# EAGLE board shifter2-8rgb-atmel (EAGLE 6.4)
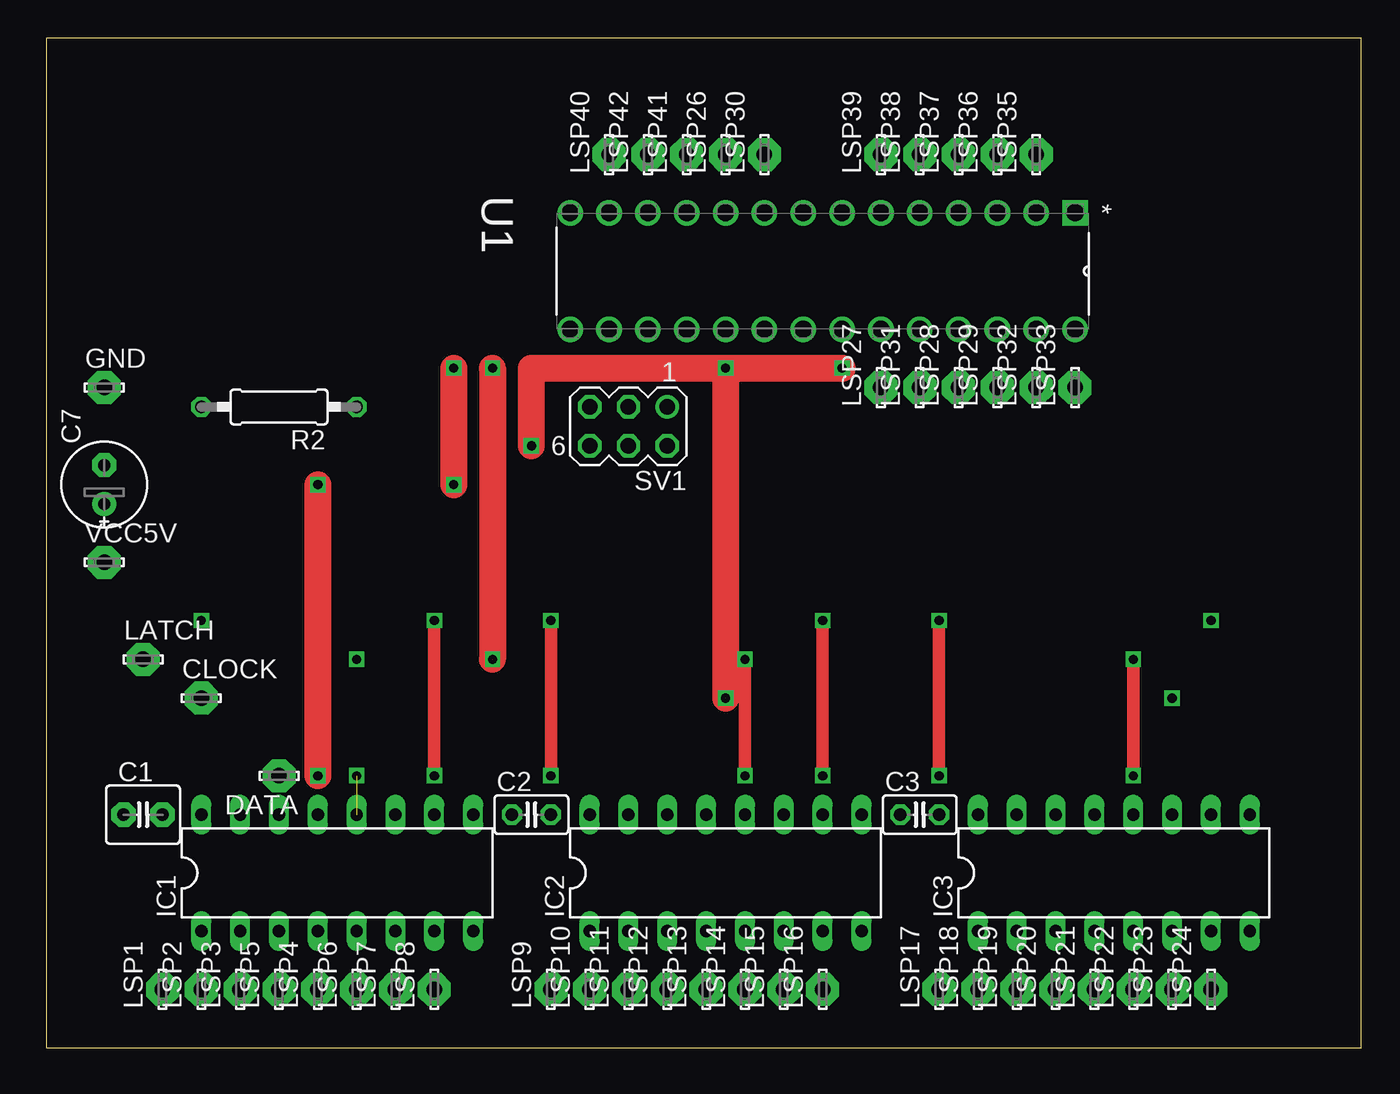
[diagram p0: board, top side]
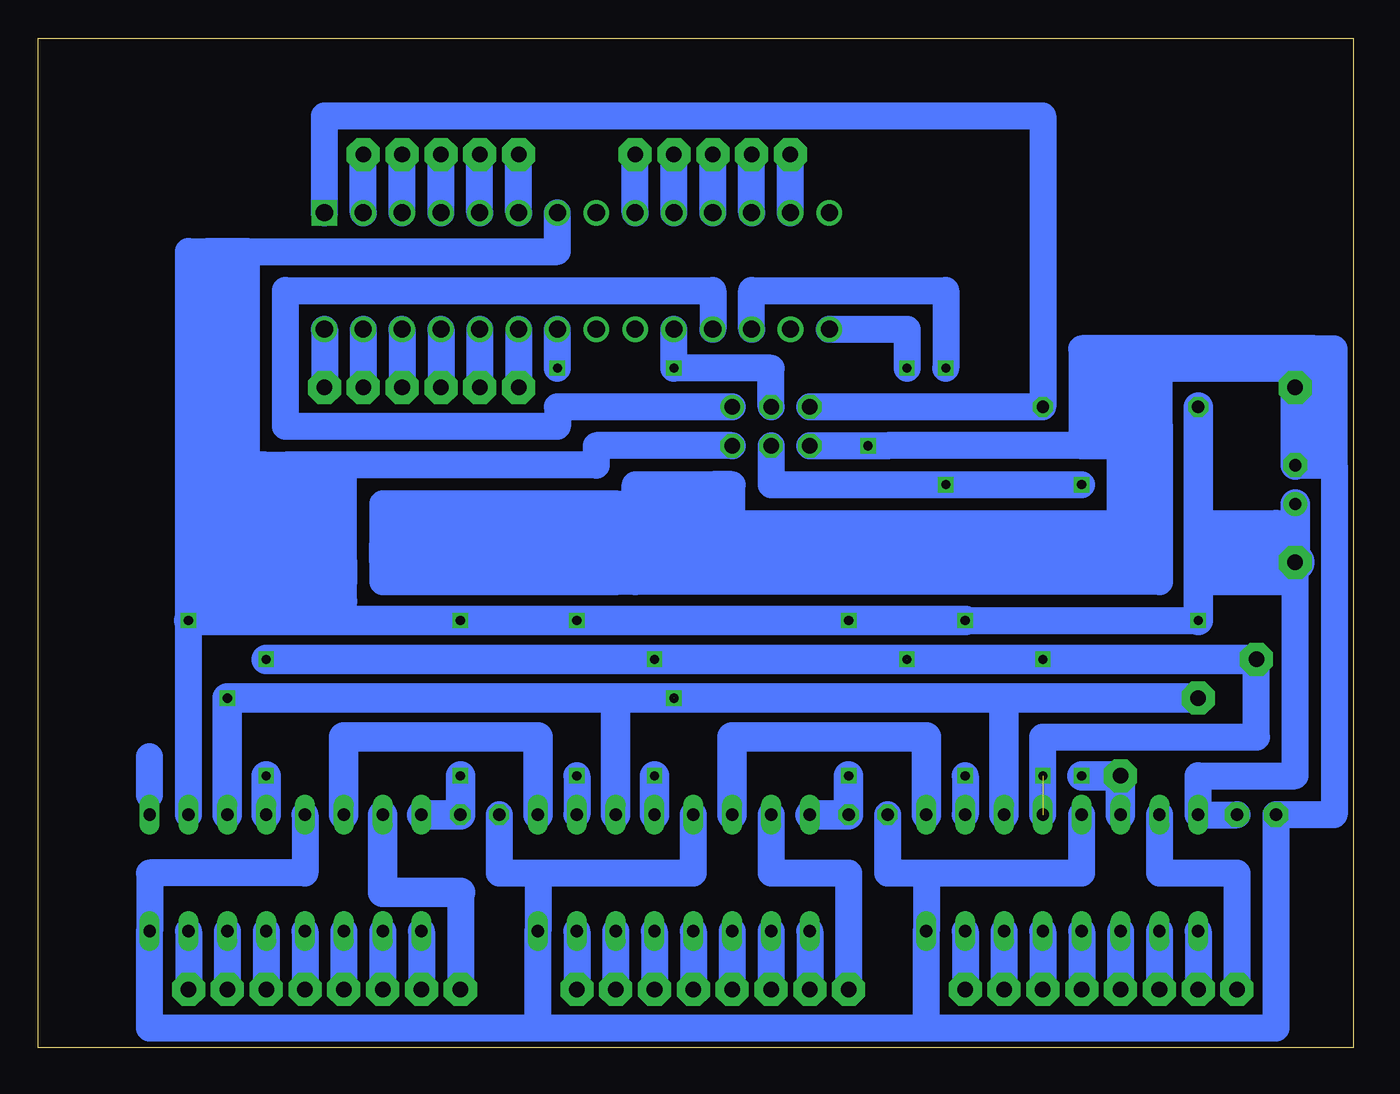
[diagram p1: board, bottom side, seen from below]

Size 86.03 x 66.03 mm. Coordinates in mm from the lower left corner, seen from the top.
Outline: 0,0 86.03,0 86.03,66.03 0,66.03 0,0
Copper layers (1*16): Top 0.035mm / dielectric 1.5mm / Bottom 0.035mm
Design rules "default *": minimum track width 10mil, minimum drill 24mil, track to track 8mil, track to pad 8mil, pad to pad 8mil, via to via 8mil, smd to smd 8mil, copper to edge 40mil, drill to drill 8mil, minimum pad ring 10mil, minimum via ring 8mil, stop-mask expansion 4mil, vias tented up to drill 0mil, thermal gap 10mil

## Footprints (pad centres in the part's own frame; a part is rotated, then mirrored left to right if it is on the bottom)
C2.5-4 = drill 0.813 pad 1.6 octagon: 1 -1.27,0; 2 1.27,0
C025-025X050 = drill 0.813 octagon: 1 -1.27,0; 2 1.27,0
E2,5-6E = drill 0.813 pad 1.575: + -1.27,0 | drill 0.813 pad 1.575 octagon: - 1.27,0
LSP10 = drill 1.016 pad 2.159 octagon: MP 0,0
DIL16 = drill 0.813 long: 1 -8.89,-3.81; 2 -6.35,-3.81; 3 -3.81,-3.81; 4 -1.27,-3.81; 5 1.27,-3.81; 6 3.81,-3.81; 7 6.35,-3.81; 8 8.89,-3.81; 9 8.89,3.81; 10 6.35,3.81; 11 3.81,3.81; 12 1.27,3.81; 13 -1.27,3.81; 14 -3.81,3.81; 15 -6.35,3.81; 16 -8.89,3.81
0207/10 = drill 0.813 octagon: 1 -5.08,0; 2 5.08,0
MA03-2 = drill 1.016: 1 -2.54,-1.27 | drill 1.016 octagon: 2 -2.54,1.27; 3 0,-1.27; 4 0,1.27; 5 2.54,-1.27; 6 2.54,1.27
DIP254P762X457-28 = drill 1.118 square: 1 -7.62,33.02 | drill 1.118: 2 -7.62,30.48; 3 -7.62,27.94; 4 -7.62,25.4; 5 -7.62,22.86; 6 -7.62,20.32; 7 -7.62,17.78; 8 -7.62,15.24; 9 -7.62,12.7; 10 -7.62,10.16; 11 -7.62,7.62; 12 -7.62,5.08; 13 -7.62,2.54; 14 -7.62,0; 15 0,0; 16 0,2.54; 17 0,5.08; 18 0,7.62; 19 0,10.16; 20 0,12.7; 21 0,15.24; 22 0,17.78; 23 0,20.32; 24 0,22.86; 25 0,25.4; 26 0,27.94; 27 0,30.48; 28 0,33.02

## Placement (x,y rotation side)
C1  [C2.5-4]  6.35,15.24 0 top
C2  [C025-025X050]  31.75,15.24 0 top
C3  [C025-025X050]  57.15,15.24 0 top
C7  [E2,5-6E]  3.81,36.83 90 top
CLOCK  LSP10  [LSP10]  10.16,22.86 0 top
DATA  LSP10  [LSP10]  15.24,17.78 180 top
GND  LSP10  [LSP10]  3.81,43.18 0 top
IC1  74HC595N  [DIL16]  19.05,11.43 0 top
IC2  74HC595N  [DIL16]  44.45,11.43 0 top
IC3  74HC595N  [DIL16]  69.85,11.43 0 top
LATCH  LSP10  [LSP10]  6.35,25.4 0 top
LSP1  LSP10  [LSP10]  7.62,3.81 90 top
LSP2  LSP10  [LSP10]  10.16,3.81 90 top
LSP3  LSP10  [LSP10]  12.7,3.81 90 top
LSP4  LSP10  [LSP10]  17.78,3.81 90 top
LSP5  LSP10  [LSP10]  15.24,3.81 90 top
LSP6  LSP10  [LSP10]  20.32,3.81 90 top
LSP7  LSP10  [LSP10]  22.86,3.81 90 top
LSP8  LSP10  [LSP10]  25.4,3.81 90 top
LSP9  LSP10  [LSP10]  33.02,3.81 90 top
LSP10  LSP10  [LSP10]  35.56,3.81 90 top
LSP11  LSP10  [LSP10]  38.1,3.81 90 top
LSP12  LSP10  [LSP10]  40.64,3.81 90 top
LSP13  LSP10  [LSP10]  43.18,3.81 90 top
LSP14  LSP10  [LSP10]  45.72,3.81 90 top
LSP15  LSP10  [LSP10]  48.26,3.81 90 top
LSP16  LSP10  [LSP10]  50.8,3.81 90 top
LSP17  LSP10  [LSP10]  58.42,3.81 90 top
LSP18  LSP10  [LSP10]  60.96,3.81 90 top
LSP19  LSP10  [LSP10]  63.5,3.81 90 top
LSP20  LSP10  [LSP10]  66.04,3.81 90 top
LSP21  LSP10  [LSP10]  68.58,3.81 90 top
LSP22  LSP10  [LSP10]  71.12,3.81 90 top
LSP23  LSP10  [LSP10]  73.66,3.81 90 top
LSP24  LSP10  [LSP10]  76.2,3.81 90 top
LSP26  LSP10  [LSP10]  44.45,58.42 90 top
LSP27  LSP10  [LSP10]  54.61,43.18 90 top
LSP28  LSP10  [LSP10]  59.69,43.18 90 top
LSP29  LSP10  [LSP10]  62.23,43.18 90 top
LSP30  LSP10  [LSP10]  46.99,58.42 90 top
LSP31  LSP10  [LSP10]  57.15,43.18 90 top
LSP32  LSP10  [LSP10]  64.77,43.18 90 top
LSP33  LSP10  [LSP10]  67.31,43.18 90 top
LSP35  LSP10  [LSP10]  64.77,58.42 90 top
LSP36  LSP10  [LSP10]  62.23,58.42 90 top
LSP37  LSP10  [LSP10]  59.69,58.42 90 top
LSP38  LSP10  [LSP10]  57.15,58.42 90 top
LSP39  LSP10  [LSP10]  54.61,58.42 90 top
LSP40  LSP10  [LSP10]  36.83,58.42 90 top
LSP41  LSP10  [LSP10]  41.91,58.42 90 top
LSP42  LSP10  [LSP10]  39.37,58.42 90 top
R2  [0207/10]  15.24,41.91 180 top
SV1  [MA03-2]  38.1,40.64 180 top
U1  ATMEGA168A-PU  [DIP254P762X457-28]  34.29,46.99 270 top
VCC5V  LSP10  [LSP10]  3.81,31.75 0 top

## Library data of the parts
C1 = capacitor-wima
C2 C3 R2 = resistor
C7 = rcl
CLOCK DATA GND LATCH LSP1-LSP24 LSP26-LSP33 LSP35-LSP42 VCC5V = solpad
IC1-IC3 = 74xx-eu
SV1 = con-lstb; OC_FARNELL: unknown; OC_NEWARK: unknown
U1 = Atmel_By_element14_Batch_1; DESCRIPTION: MCU; MPN: ATMEGA168A-PU; OC_FARNELL: 1841605; OC_NEWARK: 12T1297; PACKAGE: DIP-28; SUPPLIER: Atmel

## Nets
AVCC: U1.20
GND: SV1.6 U1.22
N$1: IC2.15 LSP9.MP
N$2: IC2.1 LSP10.MP
N$3: IC2.2 LSP11.MP
N$4: IC1.9 IC2.14
N$5: IC2.9 IC3.14
N$6: IC2.3 LSP12.MP
N$7: IC2.4 LSP13.MP
N$8: IC2.5 LSP14.MP
N$10: IC2.6 LSP15.MP
N$11: IC2.7 LSP16.MP
N$12: IC1.15 LSP1.MP
N$13: IC1.1 LSP2.MP
N$14: IC1.2 LSP3.MP
N$15: IC1.4 LSP4.MP
N$16: IC1.3 LSP5.MP
N$17: IC1.5 LSP6.MP
N$18: IC1.6 LSP7.MP
N$19: IC1.7 LSP8.MP
N$20: R2.1 SV1.5 U1.1
N$21: LSP28.MP U1.25
N$22: DATA.MP IC1.14 SV1.4 U1.17
N$23: SV1.1 U1.18
N$24: LSP29.MP U1.26
N$25: LSP26.MP U1.10
N$26: LSP30.MP U1.9
N$27: IC3.15 LSP17.MP
N$28: IC3.1 LSP18.MP
N$29: IC3.2 LSP19.MP
N$30: IC3.3 LSP20.MP
N$31: IC3.4 LSP21.MP
N$32: IC3.5 LSP22.MP
N$33: IC3.6 LSP23.MP
N$34: IC3.7 LSP24.MP
N$35: LSP27.MP U1.23
N$36: LSP31.MP U1.24
N$37: LSP32.MP U1.27
N$38: LSP33.MP U1.28
N$39: LSP35.MP U1.2
N$40: LSP36.MP U1.3
N$41: LSP37.MP U1.4
N$42: LSP38.MP U1.5
N$43: LSP39.MP U1.6
N$44: LSP41.MP U1.11
N$45: LSP42.MP U1.12
N$46: LSP40.MP U1.13
N$102: CLOCK.MP IC1.11 IC2.11 IC3.11 SV1.3 U1.19
N$104: C1.1 C2.1 C3.1 C7.- GND.MP IC1.8 IC1.13 IC2.8 IC2.13 IC3.8 IC3.13
N$110: IC1.12 IC2.12 IC3.12 LATCH.MP U1.15
VCC: C1.2 C2.2 C3.2 C7.+ IC1.10 IC1.16 IC2.10 IC2.16 IC3.10 IC3.16 R2.2 SV1.2 U1.7 VCC5V.MP

## Tracks (layer width: path | path; a pad name or v marks a point on that pad's centre or on a via)
GND  (via drill 0.6)
  Top 1.778: v31.75,39.37 31.75,44.45 v52.07,44.45
  Bottom 1.778: SV1.6 v31.75,39.37 | v52.07,44.45 U1.22
N$1
  Bottom 1.778: IC2.15 38.1,11.43 33.02,11.43 LSP9.MP
N$2
  Bottom 1.778: IC2.1 LSP10.MP
N$3
  Bottom 1.778: IC2.2 LSP11.MP
N$4
  Bottom 1.93: IC1.9 27.94,20.32 40.64,20.32 IC2.14
N$5
  Bottom 1.93: IC2.9 53.34,20.32 66.04,20.32 IC3.14
N$6
  Bottom 1.778: IC2.3 LSP12.MP
N$7
  Bottom 1.778: IC2.4 LSP13.MP
N$8
  Bottom 1.778: IC2.5 LSP14.MP
N$9
  Bottom 1.778: 78.74,16.51 78.74,19.05
N$10
  Bottom 1.778: IC2.6 LSP15.MP
N$11
  Bottom 1.778: IC2.7 LSP16.MP
N$12
  Bottom 1.778: IC1.15 12.7,11.43 7.62,11.43 LSP1.MP
N$13
  Bottom 1.778: IC1.1 LSP2.MP
N$14
  Bottom 1.778: IC1.2 LSP3.MP
N$15
  Bottom 1.778: IC1.4 LSP4.MP
N$16
  Bottom 1.778: IC1.3 LSP5.MP
N$17
  Bottom 1.778: IC1.5 LSP6.MP
N$18
  Bottom 1.778: IC1.6 LSP7.MP
N$19
  Bottom 1.778: IC1.7 LSP8.MP
N$20
  Bottom 1.778: U1.1 67.31,60.96 20.32,60.96 R2.1 SV1.5
N$21
  Bottom 1.778: U1.25 LSP28.MP
N$22  (via drill 0.6)
  Top 1.778: v26.67,44.45 v26.67,36.83 | v17.78,36.83 v17.78,17.78
  Bottom 1.778: U1.17 39.37,49.53 26.67,49.53 v26.67,44.45 | SV1.4 38.1,36.83 v26.67,36.83 v17.78,36.83
  Bottom 1.93: IC1.14 DATA.MP v17.78,17.78
N$23
  Bottom 1.778: SV1.1 52.07,41.91 52.07,40.64 69.85,40.64 69.85,49.53 41.91,49.53 U1.18
N$24
  Bottom 1.778: U1.26 LSP29.MP
N$25
  Bottom 1.778: U1.10 LSP26.MP
N$26
  Bottom 1.778: U1.9 LSP30.MP
N$27
  Bottom 1.778: 58.42,10.16 LSP17.MP
  Bottom 1.93: IC3.15 63.5,10.16 58.42,10.16
N$28
  Bottom 1.778: IC3.1 LSP18.MP
N$29
  Bottom 1.778: IC3.2 LSP19.MP
N$30
  Bottom 1.778: IC3.3 LSP20.MP
N$31
  Bottom 1.778: IC3.4 LSP21.MP
N$32
  Bottom 1.778: IC3.5 LSP22.MP
N$33
  Bottom 1.778: IC3.6 LSP23.MP
N$34
  Bottom 1.778: IC3.7 LSP24.MP
N$35
  Bottom 1.778: U1.23 LSP27.MP
N$36
  Bottom 1.778: U1.24 LSP31.MP
N$37
  Bottom 1.778: U1.27 LSP32.MP
N$38
  Bottom 1.778: U1.28 LSP33.MP
N$39
  Bottom 1.778: U1.2 LSP35.MP
N$40
  Bottom 1.778: U1.3 LSP36.MP
N$41
  Bottom 1.778: U1.4 LSP37.MP
N$42
  Bottom 1.778: U1.5 LSP38.MP
N$43
  Bottom 1.778: U1.6 LSP39.MP
N$44
  Bottom 1.778: U1.11 LSP41.MP
N$45
  Bottom 1.778: U1.12 LSP42.MP
N$46
  Bottom 1.778: U1.13 LSP40.MP
N$102  (via drill 0.6)  (1 unrouted)
  Top 1.778: v44.45,44.45 v44.45,22.86
  Bottom 1.778: U1.19 v44.45,44.45 38.1,44.45 SV1.3 | v44.45,22.86 52.07,22.86
  Bottom 1.93: 22.86,22.86 v44.45,22.86 48.26,22.86 | 48.26,22.86 52.07,22.86 v73.66,22.86 IC3.11 | IC2.11 48.26,22.86 | IC1.11 22.86,22.86 | 22.86,22.86 CLOCK.MP
N$104
  Bottom 1.778: 1.27,38.1 C7.- 2.54,38.1 2.54,43.18 | 1.27,38.1 1.27,15.24 C1.1 5.08,1.27 27.94,1.27 | 27.94,1.27 IC1.8 27.94,11.43 | 27.94,11.43 17.78,11.43 IC1.13 | C2.1 30.48,11.43 27.94,11.43 | 27.94,1.27 53.34,1.27 | 53.34,1.27 IC2.8 53.34,11.43 | 53.34,11.43 43.18,11.43 IC2.13 | C3.1 55.88,11.43 53.34,11.43 | 53.34,1.27 78.74,1.27 IC3.8 78.74,11.43 68.58,11.43 IC3.13 | GND.MP 3.81,45.72 | 3.81,45.72 17.78,45.72 17.78,39.37 | 17.78,39.37 12.7,39.37 | 12.7,39.37 12.7,38.1 | 12.7,38.1 12.7,30.48 46.99,30.48 | 46.99,30.48 46.99,35.56 | 46.99,35.56 46.99,36.83 41.91,36.83 | 41.91,36.83 41.91,35.56 | 41.91,35.56 41.91,34.29 15.24,34.29 | 13.97,34.29 13.97,33.02 15.24,33.02 | 15.24,33.02 40.64,33.02 | 40.64,33.02 45.72,33.02 45.72,35.56 43.18,35.56 | 41.91,35.56 43.18,35.56 | 43.18,35.56 43.18,34.29 45.72,34.29 45.72,31.75 13.97,31.75 | 15.24,33.02 15.24,38.1 13.97,38.1 | 13.97,38.1 13.97,34.29 | 13.97,34.29 15.24,34.29 | 15.24,34.29 15.24,44.45 | 15.24,44.45 13.97,44.45 | 13.97,44.45 12.7,44.45 | 12.7,44.45 2.54,44.45 2.54,45.72 | 15.24,44.45 16.51,44.45 16.51,40.64 12.7,40.64 | 12.7,40.64 12.7,44.45 | 12.7,40.64 12.7,39.37 | 12.7,38.1 13.97,38.1 | 13.97,38.1 13.97,44.45 | 2.54,45.72 3.81,45.72 | 2.54,45.72 1.27,45.72 1.27,38.1 | 40.64,33.02 40.64,36.83 41.91,36.83 | 48.26,31.75 48.26,33.02 | 48.26,33.02 48.26,34.29 | 48.26,34.29 48.26,35.56 | 48.26,35.56 46.99,35.56 | 48.26,35.56 63.5,35.56 63.5,34.29 | 63.5,34.29 63.5,33.02 | 63.5,31.75 63.5,30.48 48.26,30.48 | 48.26,34.29 63.5,34.29 | 46.99,30.48 48.26,30.48 | 48.26,30.48 48.26,31.75 | 48.26,31.75 63.5,31.75 | 63.5,31.75 63.5,33.02 | 63.5,33.02 48.26,33.02 | 17.78,39.37 30.48,39.37 33.02,39.37
  Bottom 1.93: C7.- GND.MP
N$110  (via drill 0.6)  (2 unrouted)
  Top 0.813: v71.12,25.4 v71.12,17.78 | v45.72,17.78 v45.72,25.4
  Top 1.778: v29.21,44.45 v29.21,25.4
  Bottom 1.778: U1.15 29.21,46.99 v29.21,44.45 | IC1.12 20.32,20.32 6.35,20.32 LATCH.MP
  Bottom 1.93: v71.12,25.4 v45.72,25.4 v29.21,25.4 LATCH.MP | v71.12,17.78 IC3.12 | IC2.12 v45.72,17.78
  other vias: 20.32,17.78 20.32,25.4 20.32,25.4
VCC  (via drill 0.6)
  Top 0.813: v25.4,17.78 v25.4,27.94 | v50.8,17.78 v50.8,27.94 | v58.42,17.78 v58.42,27.94 | v33.02,17.78 v33.02,27.94
  Bottom 0.813: v58.42,27.94 v50.8,27.94
  Bottom 1.778: U1.7 52.07,52.07 72.39,52.07 | SV1.2 49.53,39.37 49.53,38.1 66.04,38.1 | 72.39,38.1 72.39,52.07 | v50.8,17.78 IC2.10 | v25.4,17.78 IC1.10 | C1.2 IC1.16 10.16,17.78 3.81,17.78 VCC5V.MP 3.81,30.48 10.16,30.48 | v25.4,27.94 v10.16,27.94 | 66.04,31.75 66.04,30.48 | 74.93,33.02 76.2,33.02 v76.2,27.94 | IC3.10 v76.2,27.94 | v76.2,27.94 76.2,52.07 74.93,52.07 | 72.39,52.07 74.93,52.07 | 74.93,52.07 74.93,50.8 | 74.93,50.8 74.93,33.02 | 74.93,30.48 74.93,29.21 66.04,29.21 | 74.93,30.48 74.93,31.75 | 74.93,31.75 66.04,31.75 | 7.62,33.02 8.89,33.02 10.16,31.75 | 3.81,33.02 10.16,33.02 | 10.16,34.29 5.08,34.29 | 74.93,31.75 74.93,33.02 | 74.93,50.8 73.66,50.8 73.66,30.48 | 73.66,30.48 72.39,30.48 | 69.85,30.48 66.04,30.48 | 66.04,31.75 66.04,38.1 | 66.04,38.1 69.85,38.1 | 71.12,38.1 72.39,38.1 | 72.39,38.1 72.39,33.02 71.12,33.02 | 71.12,33.02 69.85,33.02 | 69.85,33.02 68.58,33.02 | 68.58,33.02 68.58,36.83 67.31,36.83 67.31,33.02 68.58,33.02 | 71.12,33.02 71.12,38.1 | 71.12,38.1 69.85,38.1 | 66.04,27.94 66.04,29.21 | 66.04,29.21 66.04,30.48 | v58.42,27.94 71.12,27.94 72.39,27.94 72.39,30.48 | 72.39,30.48 69.85,30.48 | 74.93,30.48 73.66,30.48 | 69.85,30.48 69.85,33.02 | 69.85,33.02 69.85,38.1
  Bottom 1.93: R2.2 10.16,34.29 10.16,33.02 10.16,31.75 10.16,30.48 v10.16,27.94 | v25.4,27.94 v33.02,27.94 v58.42,27.94 66.04,27.94 71.12,27.94 v76.2,27.94 | v58.42,17.78 C3.2 IC3.16 | IC2.16 C2.2 v33.02,17.78 | C7.+ 3.81,33.02 VCC5V.MP
  Bottom 2.54: VCC5V.MP 8.89,31.75
(copper drawn outside any net)
  shapes: Bottom area x1